# Altium PCB Slave_LHS.PcbDoc (part 2 of 3)
Units mil, origin at the board's own origin, x right, y up, seen from the top; angles counter-clockwise.
Board outline 6000 x 7620.08 mil, 4 copper layers (Top Layer, Int1 (GND), Int2 (PWR), Bottom Layer), stack 53.912 mil thick; 248 components, 191 nets, 688 pads, 143 vias.
Unrouted connection lines stored in the file: 218.
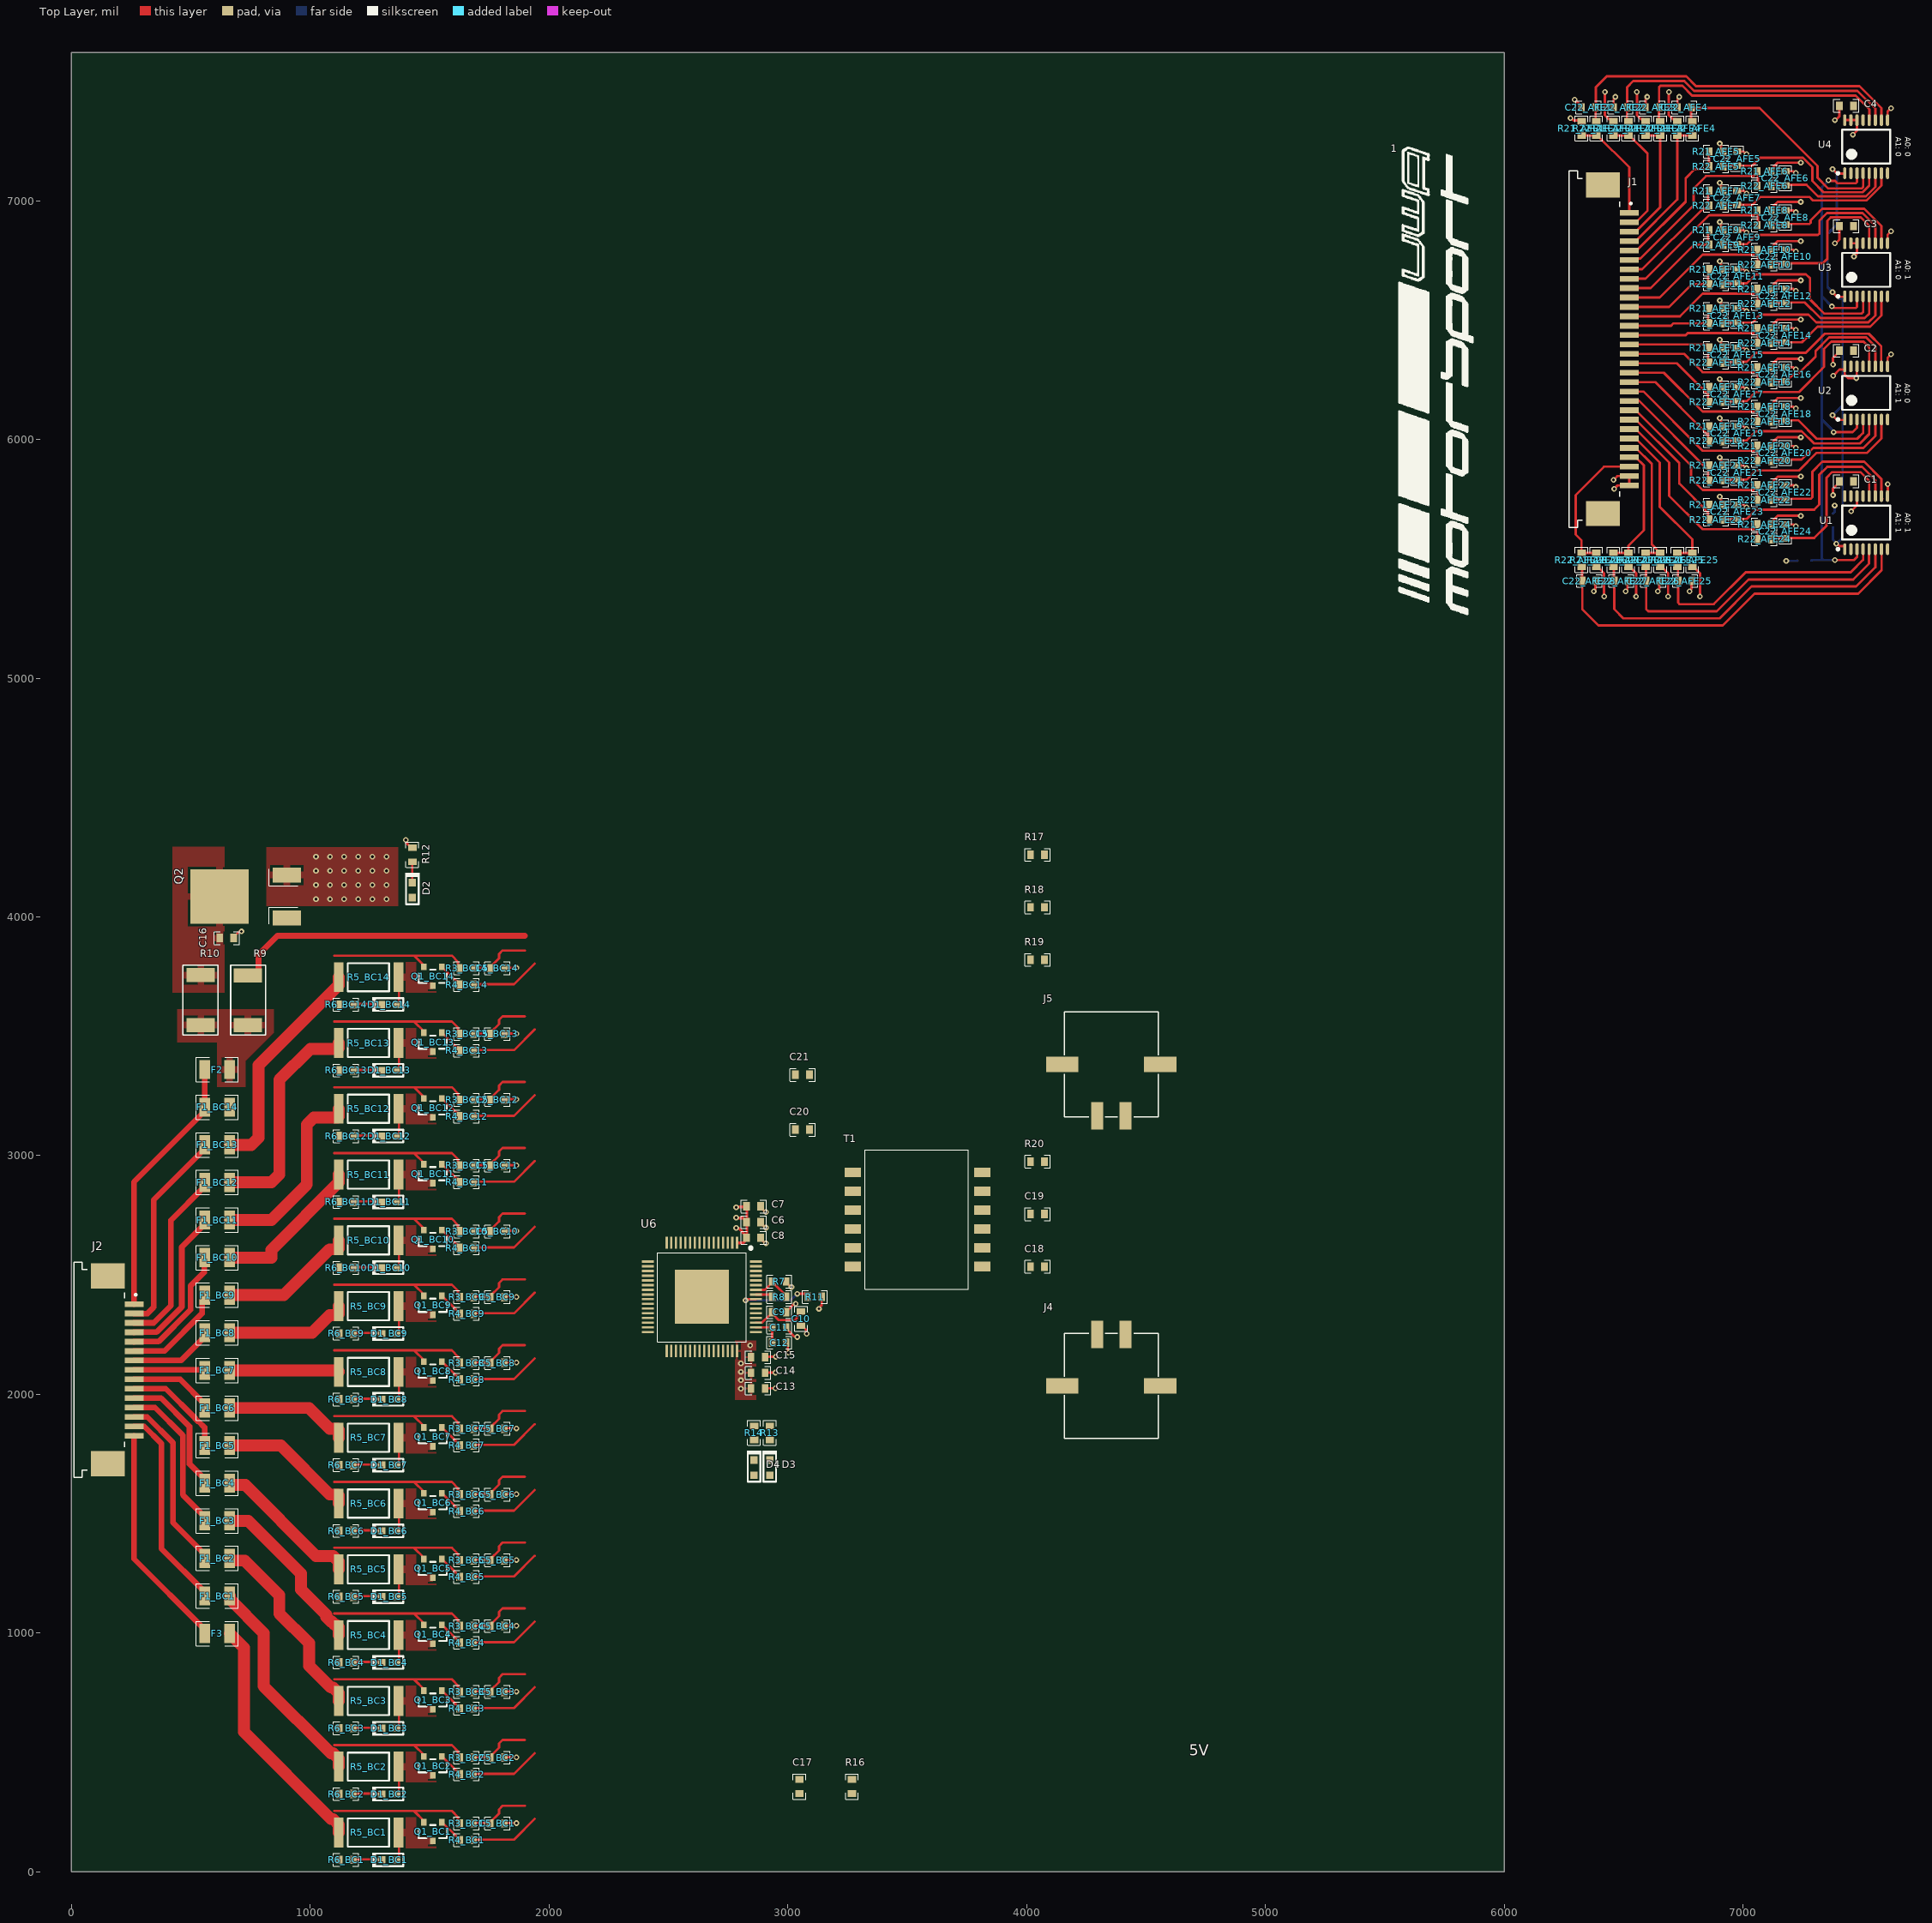
[diagram p0: Top Layer view]

## Part data (continued)
R6_BC1 R6_BC2 R6_BC3 R6_BC4 R6_BC5 R6_BC6 R6_BC7 R6_BC8 R6_BC9 R6_BC10 R6_BC11 R6_BC12 R6_BC13 R6_BC14: library part Resistor, "Resistor", Supplier Part Number 1=603-RT0603DRE07583RL, Supplier 1=Mouser
R7: "RB2"
R8 R9 R10: library part Resistor, "Resistor"
R21_AFE1 R21_AFE2 R21_AFE3 R21_AFE4 R21_AFE5 R21_AFE6 R21_AFE7 R21_AFE8 R21_AFE9 R21_AFE10 R21_AFE11 R21_AFE12 R21_AFE13 R21_AFE14 R21_AFE15 R21_AFE16 R21_AFE17 R21_AFE18 R21_AFE19 R21_AFE20 R21_AFE21 R21_AFE22 R21_AFE23 R21_AFE24 R21_AFE25 R21_AFE26 R21_AFE27 R21_AFE28: library part Resistor, "Res Thin Film 0603 10K Ohm 0.1% 0.1W(1/10W) ±25ppm/C Pad SMD T/R", Case Code (Imperial)=0603, Case Code (Metric)=1608, Manufacturer=Bourns, Max Operating Temperature=155°C, Max Power Dissipation=100mW, Min Operating Temperature=-55°C, Resistance=10kR, Resistor Type="Thin Film", Supplier Part Number 1=652-CRT0603BY1002EST, Temperature Coefficient=25ppm/°C, Tolerance=0.1%, Case/Package=0603, Category="Chip SMD Resistors", ComponentLink1Description=https://www.bourns.com/docs/Product-Datasheets/CRT-ST.pdf?src-supplier=Digi-Key, ComponentLink1URL=https://www.bourns.com/docs/Product-Datasheets/CRT-ST.pdf?src-supplier=Digi-Key, Manufacturer Part Number=CRT0603-BY-1002EST, Number of Terminations=2, Packaging="Tape and Reel", Pricing 1="1=0.33000, 10=0.15400, 50=0.15400, 100=0.08500, 1000=0.04700, 10000=0.03600 (USD)", RoHS=Yes, Stock 1=2315, Supplier 1=Mouser
T1: "BMS XFORMER 2-CH 1600V AECQ +125", Inductance=150uH, Manufacturer=Bourns, Max Operating Temperature=125°C, Min Operating Temperature=-40°C, Supplier Part Number 1=652-SM91501ALE, ComponentLink1Description=https://www.bourns.com/docs/product-datasheets/sm91501al.pdf?src-supplier=Digi-Key, ComponentLink1URL=https://www.bourns.com/docs/product-datasheets/sm91501al.pdf?src-supplier=Digi-Key, Manufacturer Part Number=SM91501ALE, Mount="Surface Mount", Packaging="Cut Tape", Pricing 1="1=5.20000, 10=4.21000, 50=3.14000, 100=3.05000, 1000=2.78000, 10000=2.78000 (USD)", RoHS=No, Stock 1=566, Supplier 1=Mouser, Turns Ratio=1:1
U1 U2 U3 U4: "Analog Multiplexer Single 8:1 16-Pin TSSOP Tube", Case/Package=TSSOP, Drain to Source Resistance=2.5R, High Level Output Current=120mA, Manufacturer="Analog Devices", Manufacturer Part Number=ADG728BRUZ, Max Operating Temperature=85°C, Max Power Dissipation=100uW, Max Supply Current=20uA, Max Supply Voltage=5.5V, Min Operating Temperature=-40°C, Min Supply Voltage=2.7V, On-State Resistance=4.5R, Operating Supply Current=10uA, Package Quantity=96, Supplier Part Number 1=584-ADG728BRUZ, -3db Bandwidth=65MHz, Bandwidth=65MHz, Category="Decoders and Multiplexers", ComponentLink1Description=https://datasheet.ciiva.com/1171/1610644-1171108.pdf?src-supplier=Element14, ComponentLink1URL=https://datasheet.ciiva.com/1171/1610644-1171108.pdf?src-supplier=Element14, ComponentLink2Description=https://datasheet.ciiva.com/5797/adg728-729-5797207.pdf?src-supplier=Farnell, ComponentLink2URL=https://datasheet.ciiva.com/5797/adg728-729-5797207.pdf?src-supplier=Farnell, ComponentLink3Description=https://datasheet.ciiva.com/1668/adg728-729-1668904.pdf?src-supplier=Digi-Key, ComponentLink3URL=https://datasheet.ciiva.com/1668/adg728-729-1668904.pdf?src-supplier=Digi-Key, ComponentLink4Description=https://datasheet.ciiva.com/2978/adg728-729-2978667.pdf?src-supplier=Avnet, ComponentLink4URL=https://datasheet.ciiva.com/2978/adg728-729-2978667.pdf?src-supplier=Avnet, ComponentLink5Description=https://datasheet.ciiva.com/7986/adg728-729-7986413.pdf?src-supplier=Element14, ComponentLink5URL=https://datasheet.ciiva.com/7986/adg728-729-7986413.pdf?src-supplier=Element14, ComponentLink6Description=https://datasheet.ciiva.com/48708/001248036-da-01-en-ic-mux-demux-8x1-adg728bruz-tssop-16-adi-48708636.pdf?src-supplier=Conrad, ComponentLink6URL=https://datasheet.ciiva.com/48708/001248036-da-01-en-ic-mux-demux-8x1-adg728bruz-tssop-16-adi-48708636.pdf?src-supplier=Conrad, Contact Plating=Tin,Matte, Height=1.05mm, Interface=Serial,2-Wire, Lead Free="Contains Lead", Length=5mm, Nominal Supply Current=20uA, Number of Bits=8, Number of Channels=1, Number of Circuits=1, Number of Inputs=8, Number of Outputs=1, Number of Pins=16, Packaging=Rail/Tube, Pricing 1="1=6.74000, 10=6.06000, 50=5.73000, 100=4.96000, 1000=3.59000, 10000=3.59000 (USD)", Radiation Hardening=No, REACH SVHC="No SVHC", RoHS=Yes, RoHS Compliant=Yes, Series=-, Stock 1=392, Supplier 1=Mouser, Supply Current=20uA, Throw Configuration=DPST, Turn-Off Delay Time=85ns, Turn-On Delay Time=95ns, Width=4.4mm
U6: "Multicell battery stack monitor that measures up to 15 series connected battery cells"

## Via types
v1: diameter 23.62, hole 11.81, Top Layer to Bottom Layer, 143 vias

## Nets (pads, with @x,y where several pads share a name; then routed paths per layer and width w, separated by ;. In a path a pad name is that pad's centre, name@x,y a point inside that pad or via, vN(x,y) a via of type N, cw(c..) or ccw(c..) an arc to the next point about the centre after c; other vN are vias at no path point)
+5: C1.2 C2.2 C3.2 C4.2 C13.2 C14.2 C15.2 D2.2 D3.2 D4.2 Q2.3 R11.1 U1.2 U1.13 U1.15 U1.16 U2.2 U2.13 U2.15 U3.2 U3.13 U3.16 U4.2 U4.13 U6.48 U6.52 U6.55 | length 62.8
  Top Layer w10: v1(3129.92,2358.27) 3129.92,2361.95 3141.73,2373.76 3141.73,2413.56 R11.1@3143.61,2415.44
  other v1: 2803.15,2023.62 2803.15,2059.06 2803.15,2094.49 2803.15,2129.92 2842.52,2204.72 1023.62,4074.8 1082.68,4074.8 1141.73,4074.8 1200.79,4074.8 1259.84,4074.8 1318.9,4074.8 1023.62,4133.86 1082.68,4133.86 1141.73,4133.86 1200.79,4133.86 1259.84,4133.86 1318.9,4133.86 1023.62,4192.91 1082.68,4192.91 1141.73,4192.91 1200.79,4192.91 1259.84,4192.91 1318.9,4192.91 1023.62,4251.97 1082.68,4251.97 1141.73,4251.97 1200.79,4251.97 1259.84,4251.97 1318.9,4251.97
ADCIN1: C22_AFE1.2 R22_AFE1.2 U4.10 | length 1457.8
  Top Layer w10: R22_AFE1.2@6385.83,7332.68 6382.87,7335.63 C22_AFE1.2@6382.87,7390.75 6383.86,7391.73 6383.86,7475.39 6429.45,7520.98 6762.5,7520.98 6803.17,7480.31 7487.71,7480.31 7579.72,7388.3 U4.10@7579.72,7344.59
ADCIN2: C22_AFE2.2 R22_AFE2.2 U4.11 | length 1289.9
  Top Layer w10: R22_AFE2.2@6514.27,7332.68 C22_AFE2.2@6514.27,7390.75 ; C22_AFE2.2@6516.73,7390.75 6514.52,7392.96 6514.52,7475.39 6540.26,7501.14 6754.28,7501.14 6794.95,7460.47 7479.49,7460.47 7554.13,7385.83 U4.11@7554.13,7337.6
ADCIN3: C22_AFE3.2 R22_AFE3.2 U4.12 | length 1113.4
  Top Layer w10: R22_AFE3.2@6648.13,7332.68 C22_AFE3.2@6648.13,7390.75 ; C22_AFE3.2@6650.59,7390.75 6648.37,7392.96 6648.37,7475.39 6654.28,7481.3 6746.06,7481.3 6786.73,7440.63 7471.27,7440.63 7529.53,7382.37 7529.53,7358.97 7529.27,7358.71 7529.27,7338.32 U4.12@7528.54,7337.6
ADCIN4: C22_AFE4.2 R22_AFE4.2 U4.4 | length 1006.6
  Top Layer w10: R22_AFE4.2@6781.99,7332.68 C22_AFE4.2@6781.99,7390.75 ; C22_AFE4.2@6784.45,7390.75 6787.4,7387.8 7069.88,7387.8 7312.01,7145.67 7312.01,7096.46 7357.28,7051.18 7497.05,7051.18 7502.95,7057.09 U4.4@7502.95,7115.16
ADCIN5: C22_AFE5.2 R22_AFE5.2 U4.5 | length 784
  Top Layer w10: R22_AFE5.2@6917.32,7143.7 6920.28,7146.65 C22_AFE5.2@6975.39,7146.65 7038.95,7146.65 7072.55,7180.26 7250.75,7180.26 7290.13,7140.87 7290.13,7082.78 7337.48,7035.43 7501.1,7035.43 7528.54,7062.88 U4.5@7528.54,7115.16
ADCIN6: C22_AFE6.2 R22_AFE6.2 U4.6 | length 529.4
  Top Layer w10: R22_AFE6.2@7119.09,7066.93 C22_AFE6.2@7177.17,7066.93 ; C22_AFE6.2@7177.17,7064.47 7179.38,7066.68 7265.99,7066.68 7313.98,7018.7 7515.12,7018.7 7554.13,7057.71 U4.6@7554.13,7115.16
ADCIN7: C22_AFE7.2 R22_AFE7.2 U4.7 | length 761.3
  Top Layer w10: R22_AFE7.2@6917.32,6979.33 6920.28,6982.28 C22_AFE7.2@6975.39,6982.28 7038.95,6982.28 7072.55,7015.89 7278.29,7015.89 7293.19,7000.98 7517.2,7000.98 7579.72,7063.5 U4.7@7579.72,7115.16
ADCIN8: C22_AFE8.2 R22_AFE8.2 U3.10 | length 595.4
  Top Layer w10: R22_AFE8.2@7119.09,6902.56 C22_AFE8.2@7177.17,6902.56 ; C22_AFE8.2@7177.17,6900.1 7179.38,6902.31 7277.61,6902.31 7283.46,6908.17 7283.46,6917.72 7331.61,6965.87 7507.92,6965.87 7579.72,6894.06 U3.10@7579.72,6821.85
ADCIN9: C22_AFE9.2 R22_AFE9.2 U3.11 | length 818.4
  Top Layer w10: R22_AFE9.2@6917.32,6814.96 6920.28,6817.91 C22_AFE9.2@6975.39,6817.91 7015.75,6817.91 7054.13,6856.3 7314.02,6856.3 7319.88,6862.16 7319.88,6916.34 7351.54,6947.99 7500.51,6947.99 7554.13,6894.37 U3.11@7554.13,6821.85
ADCIN10: C22_AFE10.2 R22_AFE10.2 U3.12 | length 670.9
  Top Layer w10: R22_AFE10.2@7119.09,6738.19 C22_AFE10.2@7177.17,6738.19 ; C22_AFE10.2@7177.17,6735.73 7179.38,6737.94 7334.4,6737.94 7353.35,6756.89 7353.35,6916.34 7367.13,6930.12 7493.11,6930.12 7528.54,6894.68 U3.12@7528.54,6821.85
ADCIN11: C22_AFE11.2 R22_AFE11.2 U3.4 | length 791.1
  Top Layer w10: R22_AFE11.2@6917.32,6650.59 6920.28,6653.54 C22_AFE11.2@6975.39,6653.54 7015.75,6653.54 7054.13,6691.93 7263.78,6691.93 7280.51,6675.2 7280.51,6586.61 7339.57,6527.56 7497.09,6527.56 7502.95,6533.42 U3.4@7502.95,6599.41
ADCIN12: C22_AFE12.2 R22_AFE12.2 U3.5 | length 518.2
  Top Layer w10: R22_AFE12.2@7119.09,6573.82 C22_AFE12.2@7177.17,6573.82 ; C22_AFE12.2@7177.17,6571.36 7179.38,6573.57 7259.1,6573.57 7324.8,6507.87 7509.84,6507.87 7528.54,6526.57 U3.5@7528.54,6599.41
ADCIN13: C22_AFE13.2 R22_AFE13.2 U3.6 | length 757.5
  Top Layer w10: R22_AFE13.2@6917.32,6486.22 6920.28,6489.17 C22_AFE13.2@6975.39,6489.17 7038.95,6489.17 7072.55,6522.78 7273.85,6522.78 7306.47,6490.16 7524.72,6490.16 7554.13,6519.57 U3.6@7554.13,6599.41
ADCIN14: C22_AFE14.2 R22_AFE14.2 U3.7 | length 587
  Top Layer w10: R22_AFE14.2@7119.09,6409.45 C22_AFE14.2@7177.17,6409.45 ; C22_AFE14.2@7177.17,6406.99 7246.56,6406.99 7312.01,6472.44 7532.48,6472.44 7579.72,6519.69 U3.7@7579.72,6599.41
ADCIN15: C22_AFE15.2 R22_AFE15.2 U2.10 | length 818.4
  Top Layer w10: R22_AFE15.2@6917.32,6321.85 6920.28,6324.8 C22_AFE15.2@6975.39,6324.8 7015.75,6324.8 7054.13,6363.19 7262.8,6363.19 7290.2,6390.59 7290.2,6390.95 7342.16,6442.91 7526.57,6442.91 7579,6390.49 7579,6306.83 U2.10@7579.72,6306.1
ADCIN16: C22_AFE16.2 R22_AFE16.2 U2.11 | length 623.8
  Top Layer w10: R22_AFE16.2@7119.09,6245.08 C22_AFE16.2@7177.17,6245.08 ; C22_AFE16.2@7177.17,6242.62 7179.38,6244.83 7183.32,6244.83 7211.96,6273.48 7230.08,6273.48 7304.2,6347.6 7304.2,6371.13 7360.24,6427.17 7515.75,6427.17 7554.13,6388.78 U2.11@7554.13,6306.1
ADCIN17: C22_AFE17.2 R22_AFE17.2 U2.12 | length 849.5
  Top Layer w10: R22_AFE17.2@6917.32,6157.48 6920.28,6160.43 C22_AFE17.2@6975.39,6160.43 7015.75,6160.43 7054.13,6198.82 7234.24,6198.82 7338.58,6303.16 7338.58,6378.94 7369.09,6409.45 7504.92,6409.45 7528.54,6385.83 7528.54,6335.71 U2.12@7528.54,6306.1
ADCIN18: C22_AFE18.2 R22_AFE18.2 U2.4 | length 483.2
  Top Layer w10: R22_AFE18.2@7119.09,6080.71 C22_AFE18.2@7177.17,6080.71 ; C22_AFE18.2@7177.17,6078.25 7179.38,6080.46 7231.54,6080.46 7309.06,6002.95 7478.35,6002.95 7502.95,6027.56 U2.4@7502.95,6083.66
ADCIN19: C22_AFE19.2 R22_AFE19.2 U2.5 | length 726.9
  Top Layer w10: R22_AFE19.2@6917.32,5993.11 6920.28,5996.06 C22_AFE19.2@6975.39,5996.06 7015.75,5996.06 7054.13,6034.45 7246.06,6034.45 7297.24,5983.27 7489.17,5983.27 7528.54,6022.64 U2.5@7528.54,6083.66
ADCIN20: C22_AFE20.2 R22_AFE20.2 U2.6 | length 545.7
  Top Layer w10: R22_AFE20.2@7119.09,5916.34 C22_AFE20.2@7177.17,5916.34 ; C22_AFE20.2@7177.17,5913.88 7179.38,5916.09 7245.82,5916.09 7294.29,5964.57 7503.94,5964.57 7554.13,6014.76 U2.6@7554.13,6083.66
ADCIN21: C22_AFE21.2 R22_AFE21.2 U2.7 | length 814.7
  Top Layer w10: R22_AFE21.2@6917.32,5828.74 6920.28,5831.69 C22_AFE21.2@6975.39,5831.69 7015.75,5831.69 7054.13,5870.08 7235.24,5870.08 7309.06,5943.9 7519.68,5943.9 7579.72,6003.94 U2.7@7579.72,6083.66
ADCIN22: C22_AFE22.2 R22_AFE22.2 U1.10 | length 697
  Top Layer w10: R22_AFE22.2@7119.09,5751.97 C22_AFE22.2@7177.17,5751.97 ; C22_AFE22.2@7177.17,5749.51 7179.38,5751.72 7284.5,5751.72 7290.35,5757.58 7290.35,5864.47 7332.38,5906.5 7507.2,5906.5 7579.72,5833.98 U1.10@7579.72,5762.8 ; U1.10@7577.54,5757 U1.10@7582.82,5751.71
ADCIN23: C22_AFE23.2 R22_AFE23.2 U1.11 | length 891
  Top Layer w10: R22_AFE23.2@6917.32,5664.37 6920.28,5667.32 C22_AFE23.2@6975.39,5667.32 7015.75,5667.32 7054.13,5705.71 7298.23,5705.71 7319.72,5727.2 7319.72,5851.86 7352.7,5884.84 7499.17,5884.84 7554.13,5829.88 U1.11@7554.13,5762.8
ADCIN24: C22_AFE24.2 R22_AFE24.2 U1.12 | length 721.4
  Top Layer w10: R22_AFE24.2@7119.09,5587.6 C22_AFE24.2@7177.17,5587.6 ; C22_AFE24.2@7177.17,5585.14 7179.38,5587.35 7298.23,5587.35 7349.41,5638.53 7349.41,5839.57 7373.03,5863.19 7491.14,5863.19 7528.54,5825.79 U1.12@7528.54,5762.28
ADCIN25: C22_AFE25.2 R22_AFE25.2 U1.4 | length 1056
  Top Layer w10: C22_AFE25.2@6724.9,5407.48 C22_AFE25.2@6727.12,5405.26 ; C22_AFE25.2@6727.36,5407.48 R22_AFE25.2@6727.36,5465.55 ; C22_AFE25.2@6728.35,5407.48 6728.35,5315.9 6734.2,5310.04 6877.95,5310.04 7011.14,5443.23 7451.1,5443.23 7502.95,5495.08 U1.4@7502.95,5544.65